# Altium PCB sensor_board.PcbDoc
Units mil, origin at the board's own origin, x right, y up, seen from the top; angles counter-clockwise.
Board outline 3688 x 2400 mil, 2 copper layers (Top, Bottom), stack 61.811 mil thick; 11 components, 24 nets, 62 pads, 0 vias.
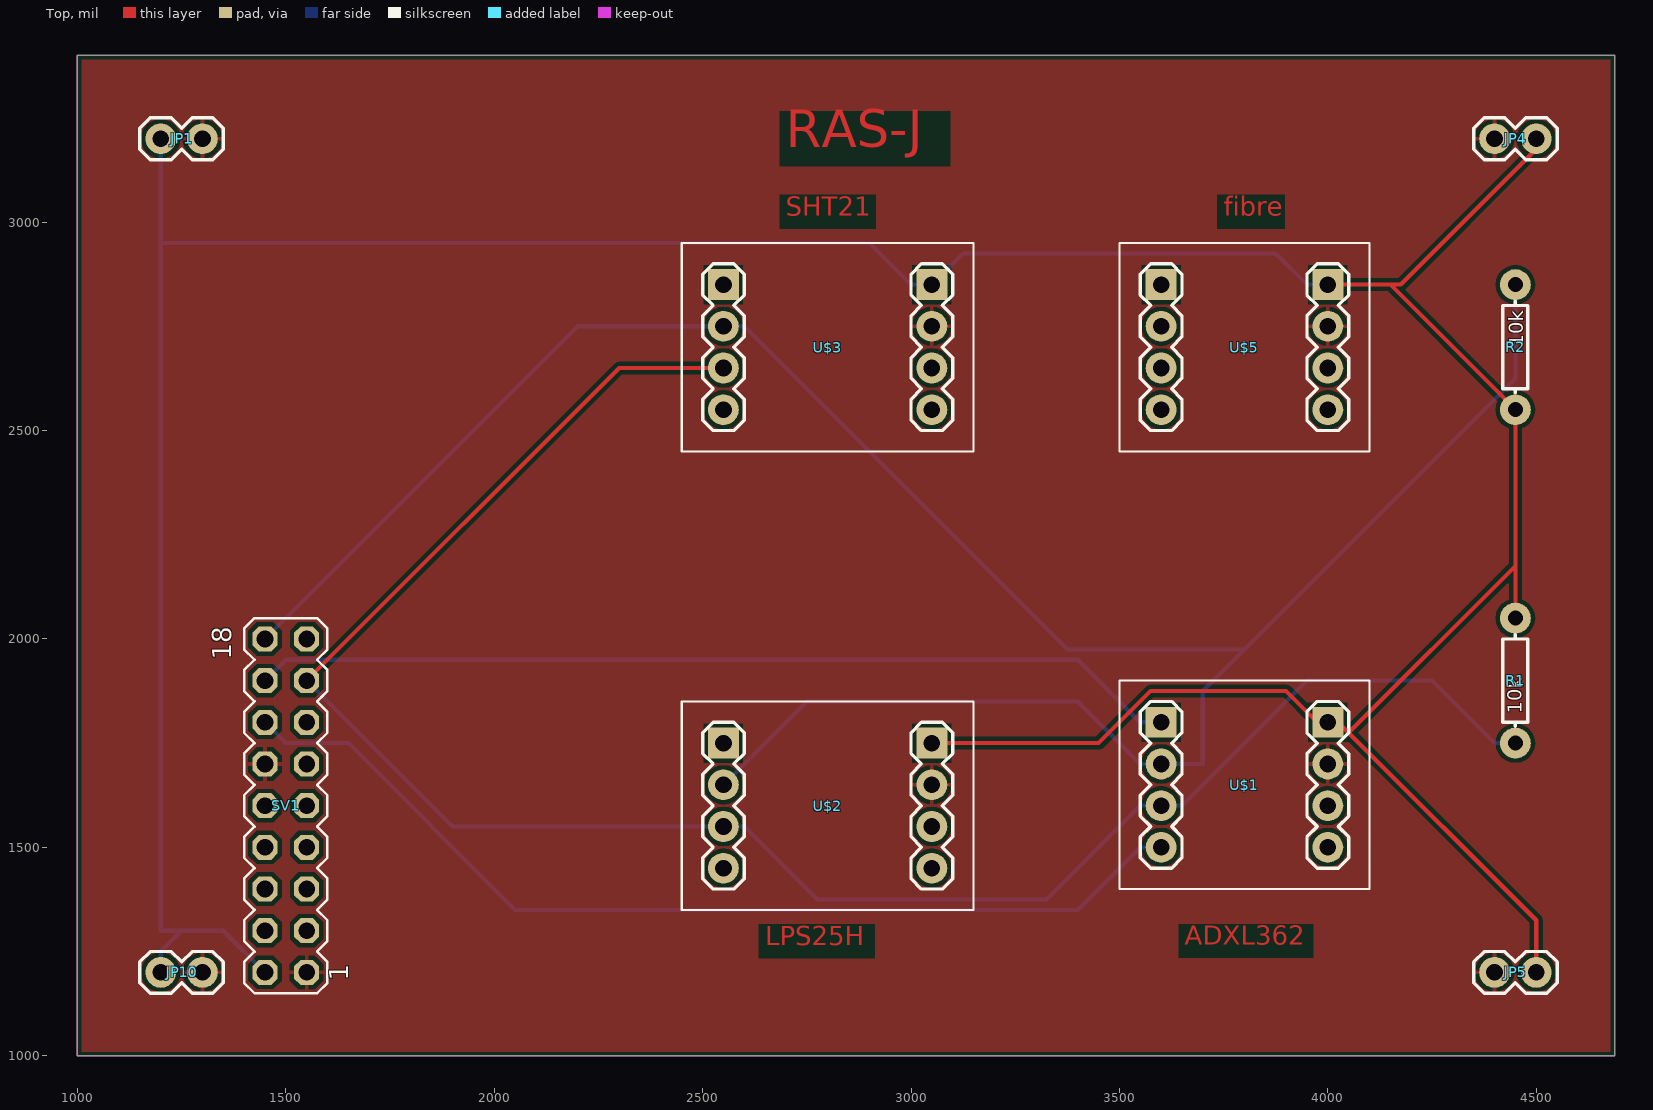
[diagram p0: Top view]
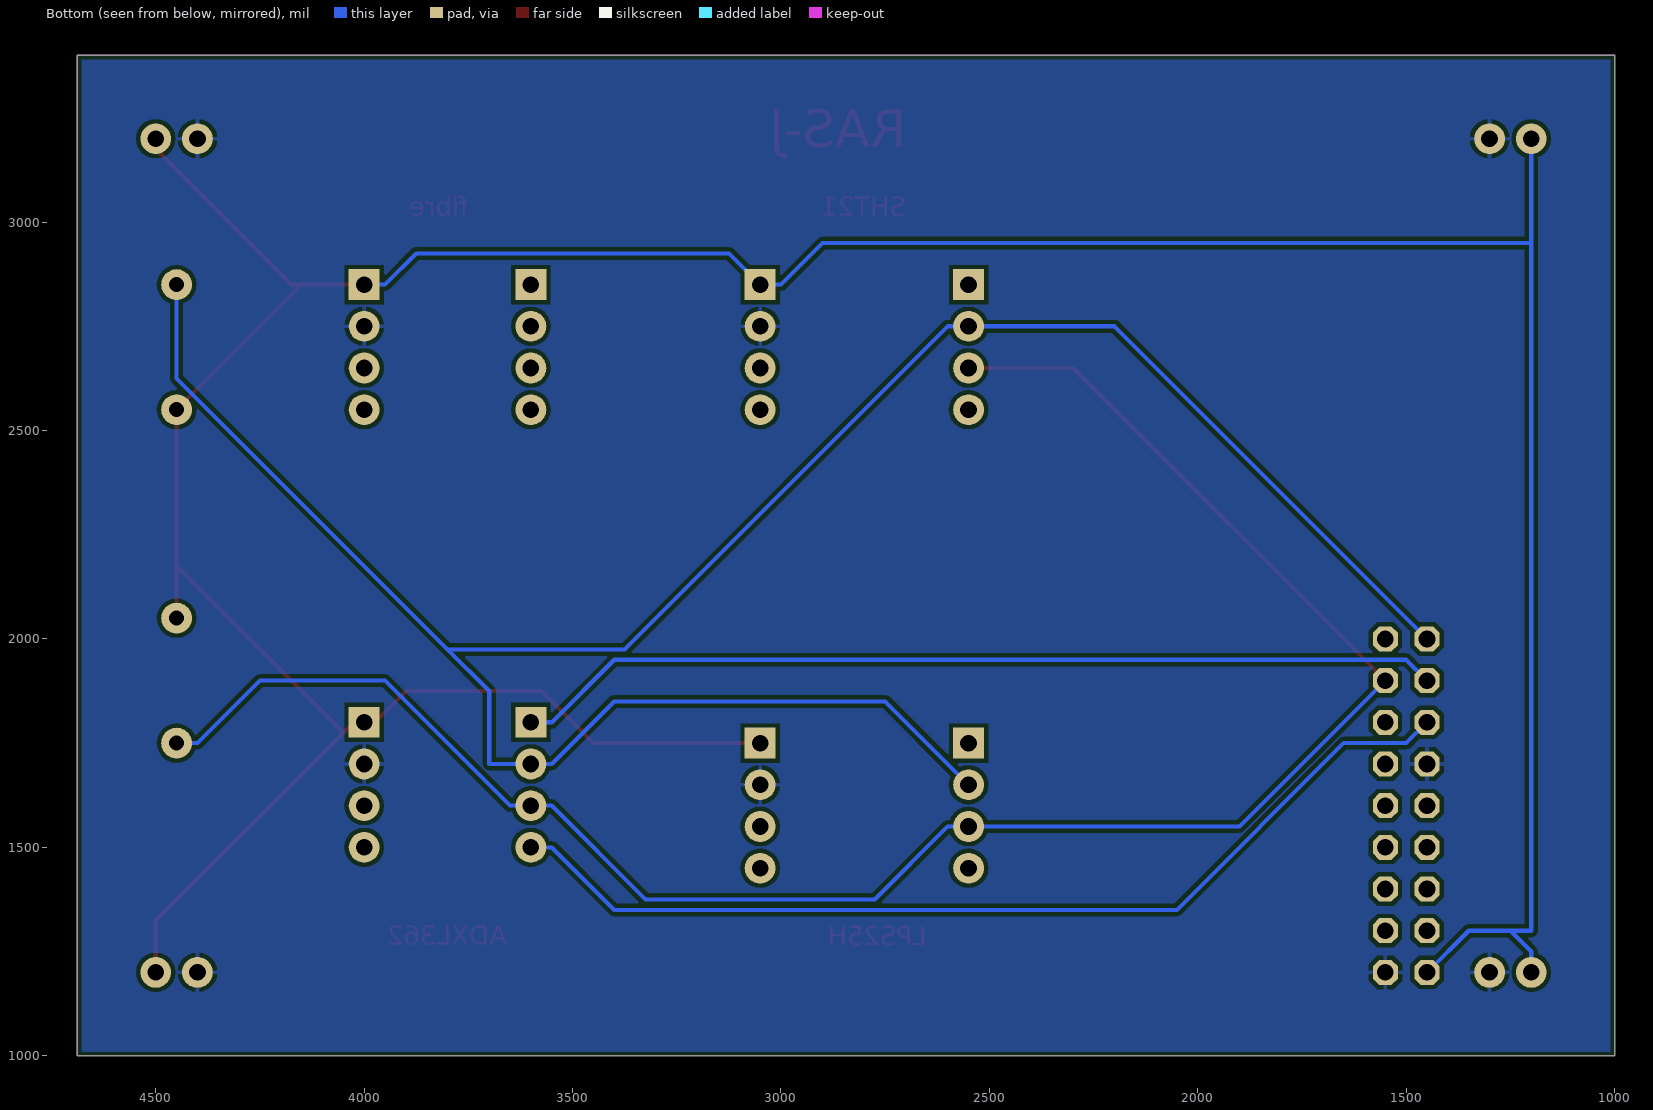
[diagram p1: Bottom view, seen from below]

## Layer stack, top to bottom
Top Solder: solder mask 0.4, Solder Resist, Dk 3.5
Top: signal copper 1.378
Dielectric 1: core 59.0551, FR-4, Dk 4.8
Bottom: signal copper 1.378
Bottom Solder: solder mask 0.4, Solder Resist, Dk 3.5

## Board outline
1000,1000 4688,1000 4688,3400 1000,3400

## Design rules (kind name [scope] priority, off if disabled: settings)
Clearance mdViaVia [IsVia vs IsVia] p1: gap=9.84
Clearance mdPadVia [IsPad vs IsVia] p2: gap=9.84
Clearance mdPadPad [IsPad vs IsPad] p3: gap=9.84
Clearance mdWireVia [(InLayerClass('Signal Layers') AND IsTrack) vs IsVia] p4: gap=9.84
Clearance mdWirePad [(InLayerClass('Signal Layers') AND IsTrack) vs IsPad] p5: gap=9.84
Clearance mdWireWire [(InLayerClass('Signal Layers') AND IsTrack) vs (InLayerClass('Signal Layers') AND IsTrack)] p6: gap=9.84
Clearance [All] p7: gap=9.84
HoleSize [All] p1: absolutevalues=TRUE maxlimit=100000 minlimit=11.81 maxpercent=80.000 minpercent=20.000
HoleToHoleClearance [All] p1: gap=8 allowstackedmicrovias=TRUE
PolygonConnect ThermalVias [IsVia] p1: connectstyle=Direct reliefconductorwidth=10 reliefentries=4 polygonreliefangle="90 Angle" airgapwidth=10
PolygonConnect [All] p2: connectstyle=Relief reliefconductorwidth=10 reliefentries=4 polygonreliefangle="90 Angle" airgapwidth=10
RoutingVias [All] p1: holewidth=28 width=50 viastyle="Through Hole" minholewidth=28 minwidth=50 maxholewidth=28 maxwidth=50
SilkToSilkClearance [All] p1 off: silktosilkclearance=10
SilkToSolderMaskClearance [IsPad] p1 off: minsilkscreentomaskgap=10 clearancetoexposedcopper=TRUE
SolderMaskExpansion [All] p1: expansion=4
UnpouredPolygon [All] p1: allowunpoured=FALSE
Width [All] p1: maxlimit=100000 minlimit=9.84 preferedwidth=10
25 further rules are at their usual default settings.

## Components (designator, comment, footprint, x,y, rotation, side; value= is the part's Value field where it differs from the comment)
JP1 "" 1X02 1200,3200 r0 top
JP4 "" 1X02 4500,3200 r180 top
JP5 "" 1X02 4500,1200 r180 top
JP10 "" 1X02 1200,1200 r0 top
R1 "10k" AXIAL-0.3 4450,1900 r90 top
R2 "10k" AXIAL-0.3 4450,2700 r270 top
SV1 "" MA09-2 1500,1600 r90 top
U$1 "SENSOR_BOARD_ADXL362_SMALL" SENSOR_BOARD_GEN_SMALL 3500,1400 r0 top
U$2 "SENSOR_BOARD_LPS25H" SENSOR_BOARD_GEN 2450,1350 r0 top
U$3 "SENSOR_BOARD_SHT21" SENSOR_BOARD_GEN 2450,2450 r0 top
U$5 "SENSOR_BOARD_FIBRE_SENSOR_SMALL" SENSOR_BOARD_GEN_SMALL 3500,2450 r0 top

## Footprints (in the part's own frame and the unit in brackets; to place one, negate y for a bottom-side part, rotate by r counter-clockwise, add the part's x,y. Pads: shape width x height; smd on the part's side, far side on the other; paste and mask are expansions set on the pad)
1X02 [mil] "1X02"
  round 74 hole 40: 1(0,0) 2(100,0)
  silkscreen extent -50,-50 150,50
AXIAL-0.3 [mil] "AXIAL-0.3"
  round 74 hole 36: P$1(-150,0) P$2(150,0)
  silkscreen extent -110,-30 110,30
MA09-2 [mil] "MA09-2"
  oct 60x60 hole 40: 1(-400,-50) 2(-400,50) 3(-300,-50) 4(-300,50) 5(-200,-50) 6(-200,50) 7(-100,-50) 8(-100,50) 9(0,-50) 10(0,50) 11(100,-50) 12(100,50) 13(200,-50) 14(200,50) 15(300,-50) 16(300,50) 17(400,-50) 18(400,50)
  silkscreen extent -450,-100 450,100
SENSOR_BOARD_GEN [mil] "SENSOR_BOARD_GEN"
  rect 74x74 hole 40: 1(100,400) VCC(600,400)
  round 74 hole 40: 2(100,300) 3(100,200) 4(100,100) 5(600,100) 6(600,200) GND(600,300)
  silkscreen extent 0,0 700,500
SENSOR_BOARD_GEN_SMALL [mil] "SENSOR_BOARD_GEN_SMALL"
  rect 74x74 hole 40: 1(100,400) VCC(500,400)
  round 74 hole 40: 2(100,300) 3(100,200) 4(100,100) 5(500,100) 6(500,200) GND(500,300)
  silkscreen extent 0,0 600,500

## Part data
JP1 JP4 JP5 JP10: library part 1X02
R1 R2: library part AXIAL-0.3
SV1: library part MA09-2
U$1 U$5: library part SENSOR_BOARD_GEN_SMALL
U$2 U$3: library part SENSOR_BOARD_GEN

## Nets (pads, with @x,y where several pads share a name; then routed paths per layer and width w, separated by ;. In a path a pad name is that pad's centre, name@x,y a point inside that pad or via, vN(x,y) a via of type N, cw(c..) or ccw(c..) an arc to the next point about the centre after c; other vN are vias at no path point)
/CS: SV1.14 U$1.4 | length 2398.5
  Bottom w10: SV1.14 1500,1750 1650,1750 2050,1350 3400,1350 3550,1500 U$1.4
CLK: SV1.16 U$1.1 | length 2232.8
  Bottom w10: SV1.16 1500,1950 3400,1950 3550,1800 U$1.1
GND: JP1.2 JP4.2 JP5.2 JP10.2 SV1.1 SV1.12 U$1.GND U$2.GND U$3.GND U$5.GND
INT1_ADXL: U$1.6
INT1_LPS: U$2.6
INT2_ADXL: U$1.5
LED1-: U$5.5
OA0+: SV1.3
OA0-: SV1.5
OA0O: SV1.4
OA1+: U$5.1
OA1-: U$5.2
OA1O: U$5.4
P2.3: SV1.6
P2.4: SV1.7
P2.6: SV1.13
P3.0: SV1.17
P4.3: SV1.8
P4.4: SV1.9
P4.5: SV1.10
P4.6: SV1.11
SCL/MISO: R1.P$1 SV1.15 U$1.3 U$2.3 U$3.3 | length 4707.7
  Top w10: SV1.15 2300,2650 U$3.3
  Bottom w10: SV1.15 1900,1550 U$2.3 2600,1550 2775,1375 3325,1375 3550,1600 U$1.3 3650,1600 3950,1900 4250,1900 4400,1750 R1.P$1
SDA/MOSI: R2.P$1 SV1.18 U$1.2 U$2.2 U$3.2 | length 5737.3
  Bottom w10: SV1.18 2200,2750 U$3.2 2600,2750 3375,1975 3800,1975 ; U$2.2 2750,1850 3400,1850 3550,1700 U$1.2 3700,1700 3700,1875 3800,1975 ; R2.P$1 4450,2625 3800,1975
VCC: JP1.1 JP4.1 JP5.1 JP10.1 R1.P$2 R2.P$2 SV1.2 U$1.VCC U$2.VCC U$3.VCC U$5.VCC | length 9219.8
  Top w10: U$2.VCC 3450,1750 3575,1875 3900,1875 3975,1800 U$1.VCC 4025,1800 4050,1775 ; U$5.VCC 4150,2850 ; R1.P$2 4450,2175 ; JP5.1 4500,1325 4050,1775 ; JP4.1 4500,3175 4175,2850 4150,2850 ; 4050,1775 4450,2175 ; 4150,2850 R2.P$2 4450,2175
  Bottom w10: JP10.1 1200,1250 1250,1300 ; JP1.1 1200,2950 ; SV1.2 1350,1300 1250,1300 ; U$5.VCC 3950,2850 3875,2925 3125,2925 U$3.VCC 3000,2850 2900,2950 1200,2950 ; 1200,2950 1200,1300 1250,1300
pads on no net: U$2.1 U$2.4 U$2.5 U$3.1 U$3.4 U$3.5 U$3.6 U$5.3 U$5.6

## Polygon pours and split planes (outlines as drawn)
GND on Bottom "Bottom-GND" (solid, remove dead copper, pour order 2): 992,3408 4758,3408 4758,992 992,992
GND on Top "Top-GND" (solid, remove dead copper, pour order 4): 992,3408 4758,3408 4758,992 992,992

## Keep-outs
Keep-Out Layer:
  the board outline again, w0

## Other copper
Top:
  text "RAS-J" at 2700,3150 h155
  text "SHT21" at 2700,3000 h77.5
  text "fibre" at 3750,3000 h77.5
  text "ADXL362" at 3656.57,1251 h77.5
  text "LPS25H" at 2650,1250 h77.5

## Silkscreen, mask and mechanical layers (free items; w line width, h text height)
Dimension:
  the board outline again, w0

## Text inside footprints (layer, text, board x,y; h text height)
SV1: Top Overlay "1" at 1665,1180 h77.5 r90; Top Overlay "18" at 1385,1950 h77.5 r90